# Altium PCB PCB2.PcbDoc
Units mil, origin at the board's own origin, x right, y up, seen from the top; angles counter-clockwise.
Board outline 1690 x 1630 mil, 2 copper layers (Top Layer, Bottom Layer); 10 components, 22 nets, 58 pads, 0 vias.
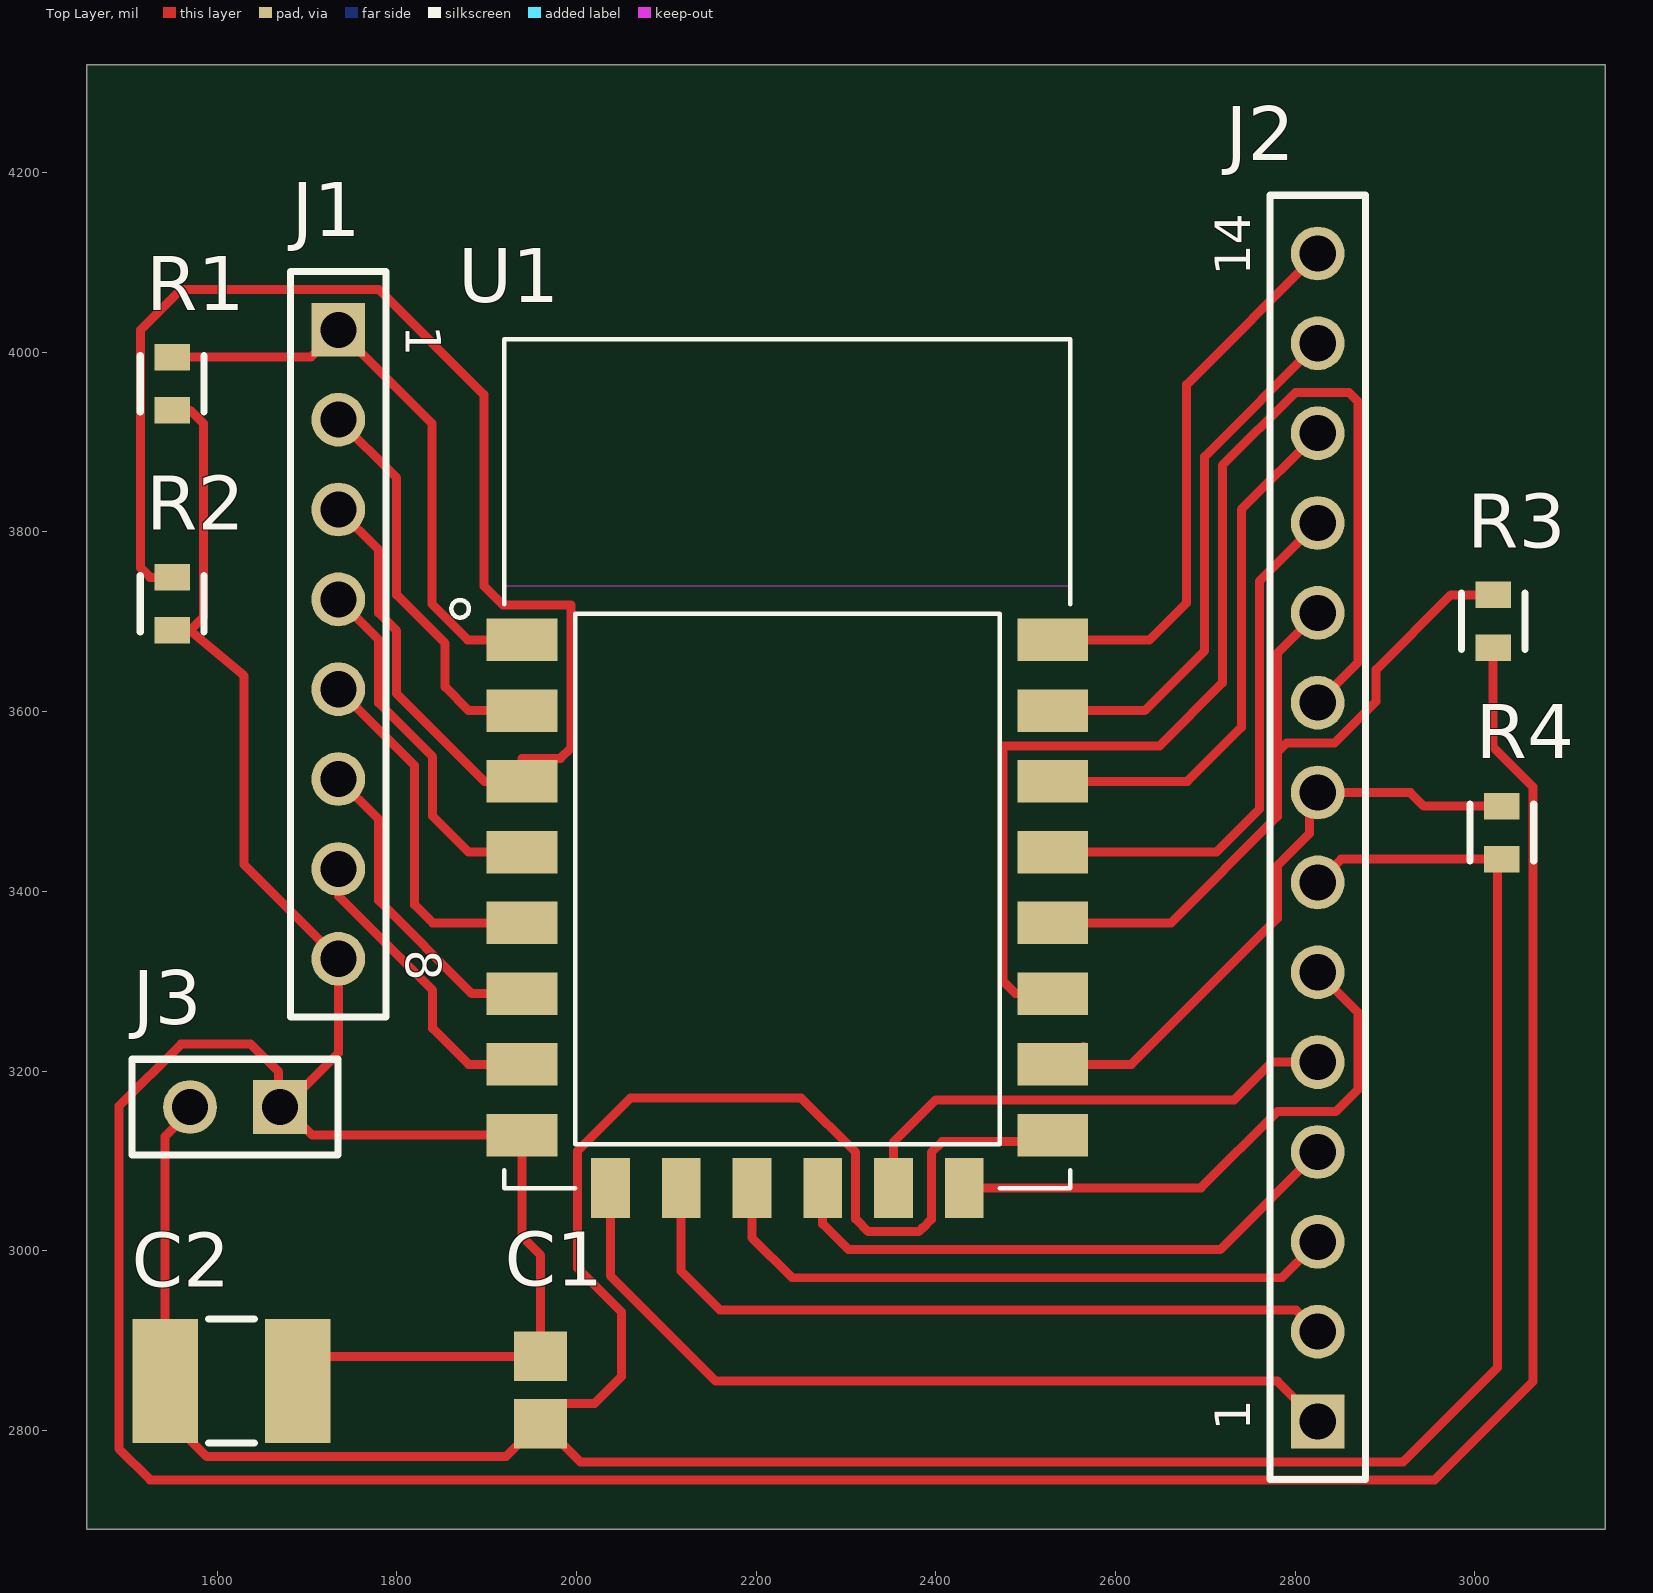
[diagram p0: Top Layer view]
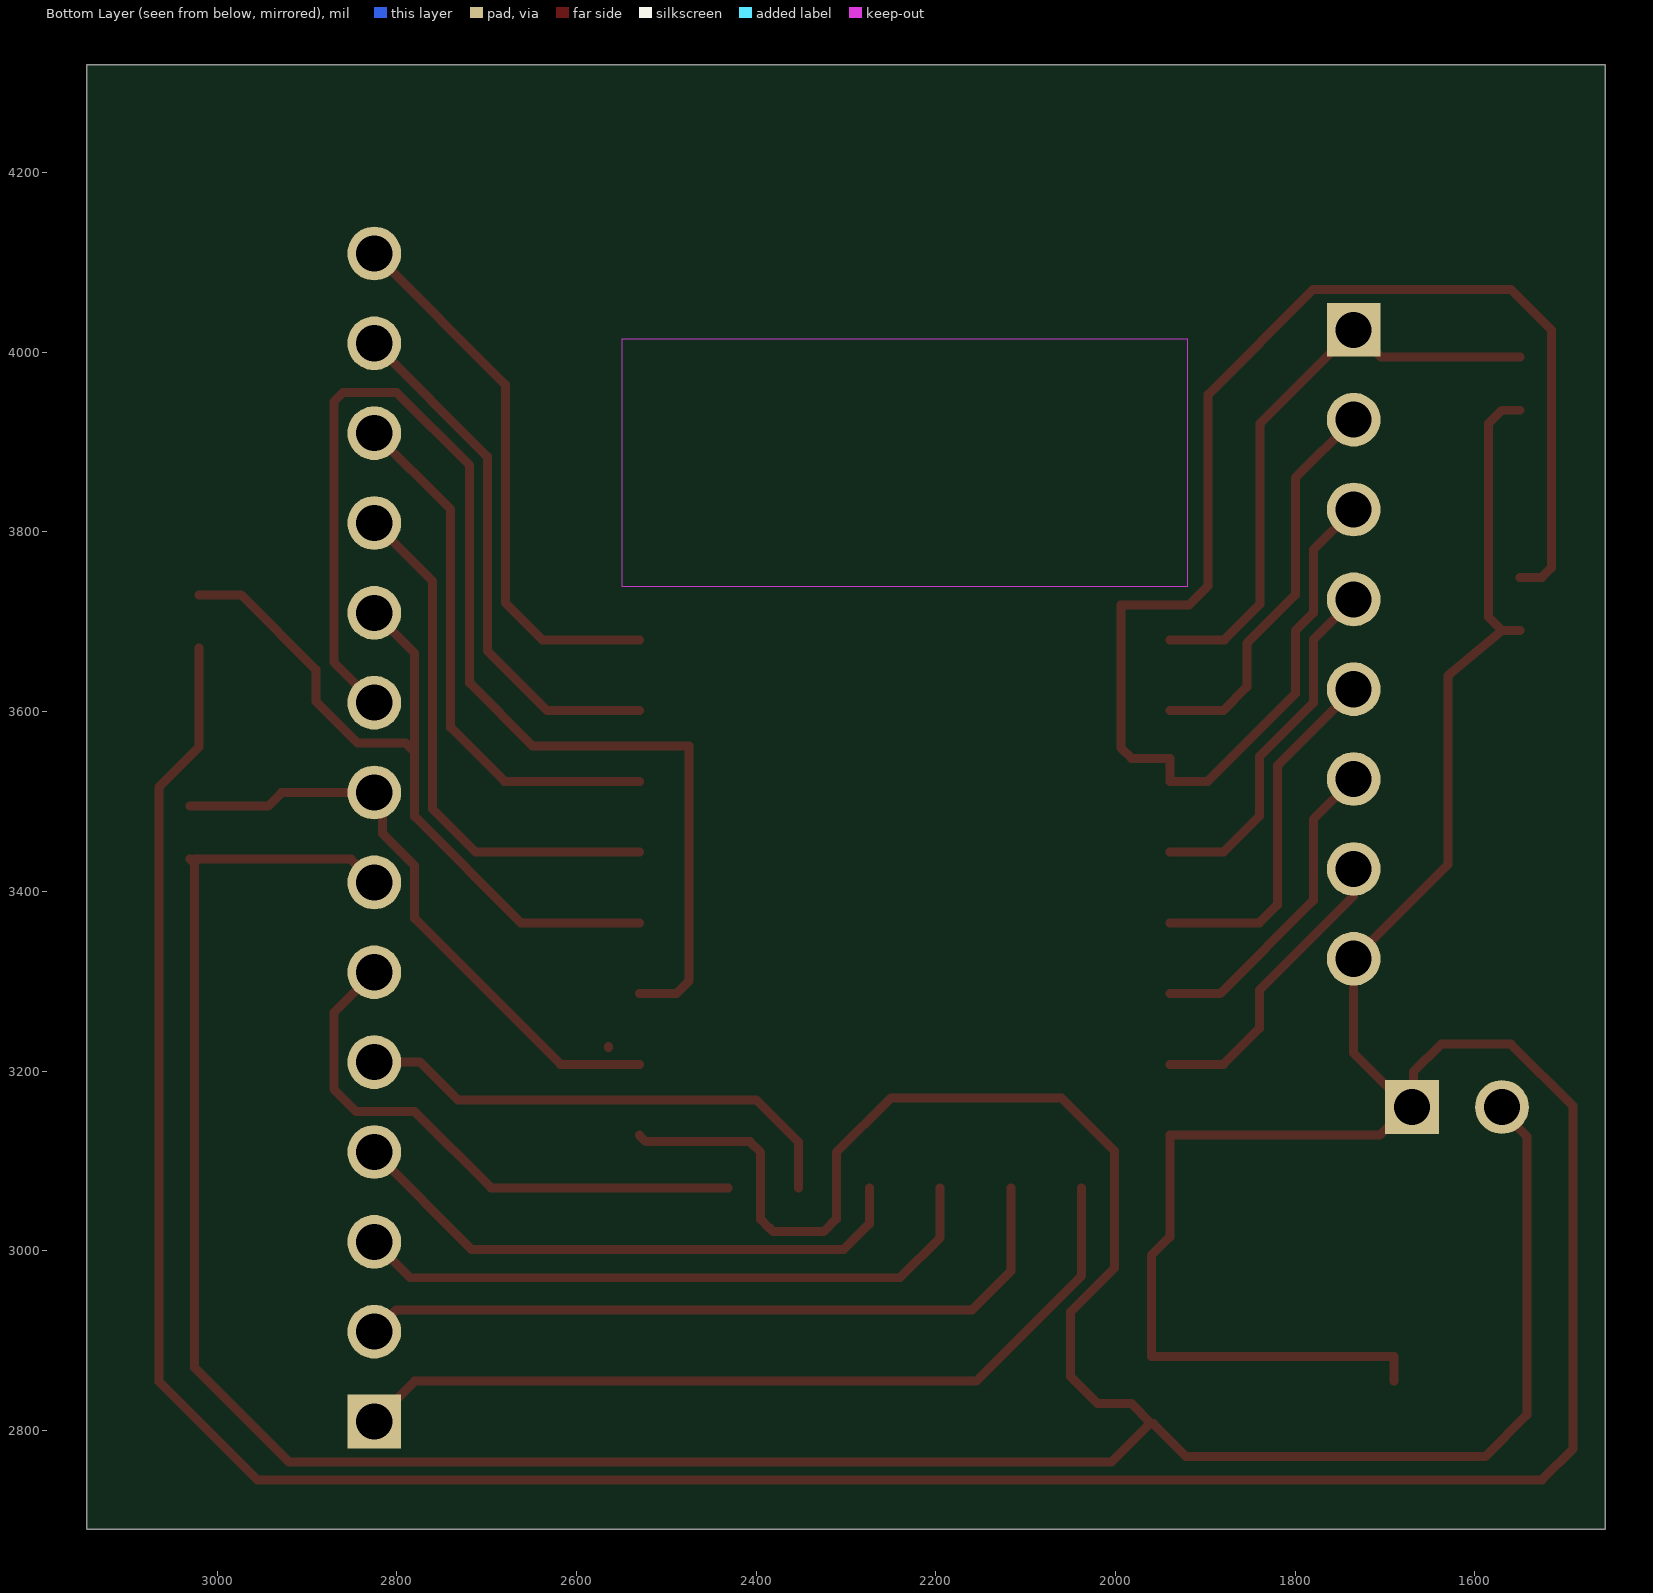
[diagram p1: Bottom Layer view, seen from below]
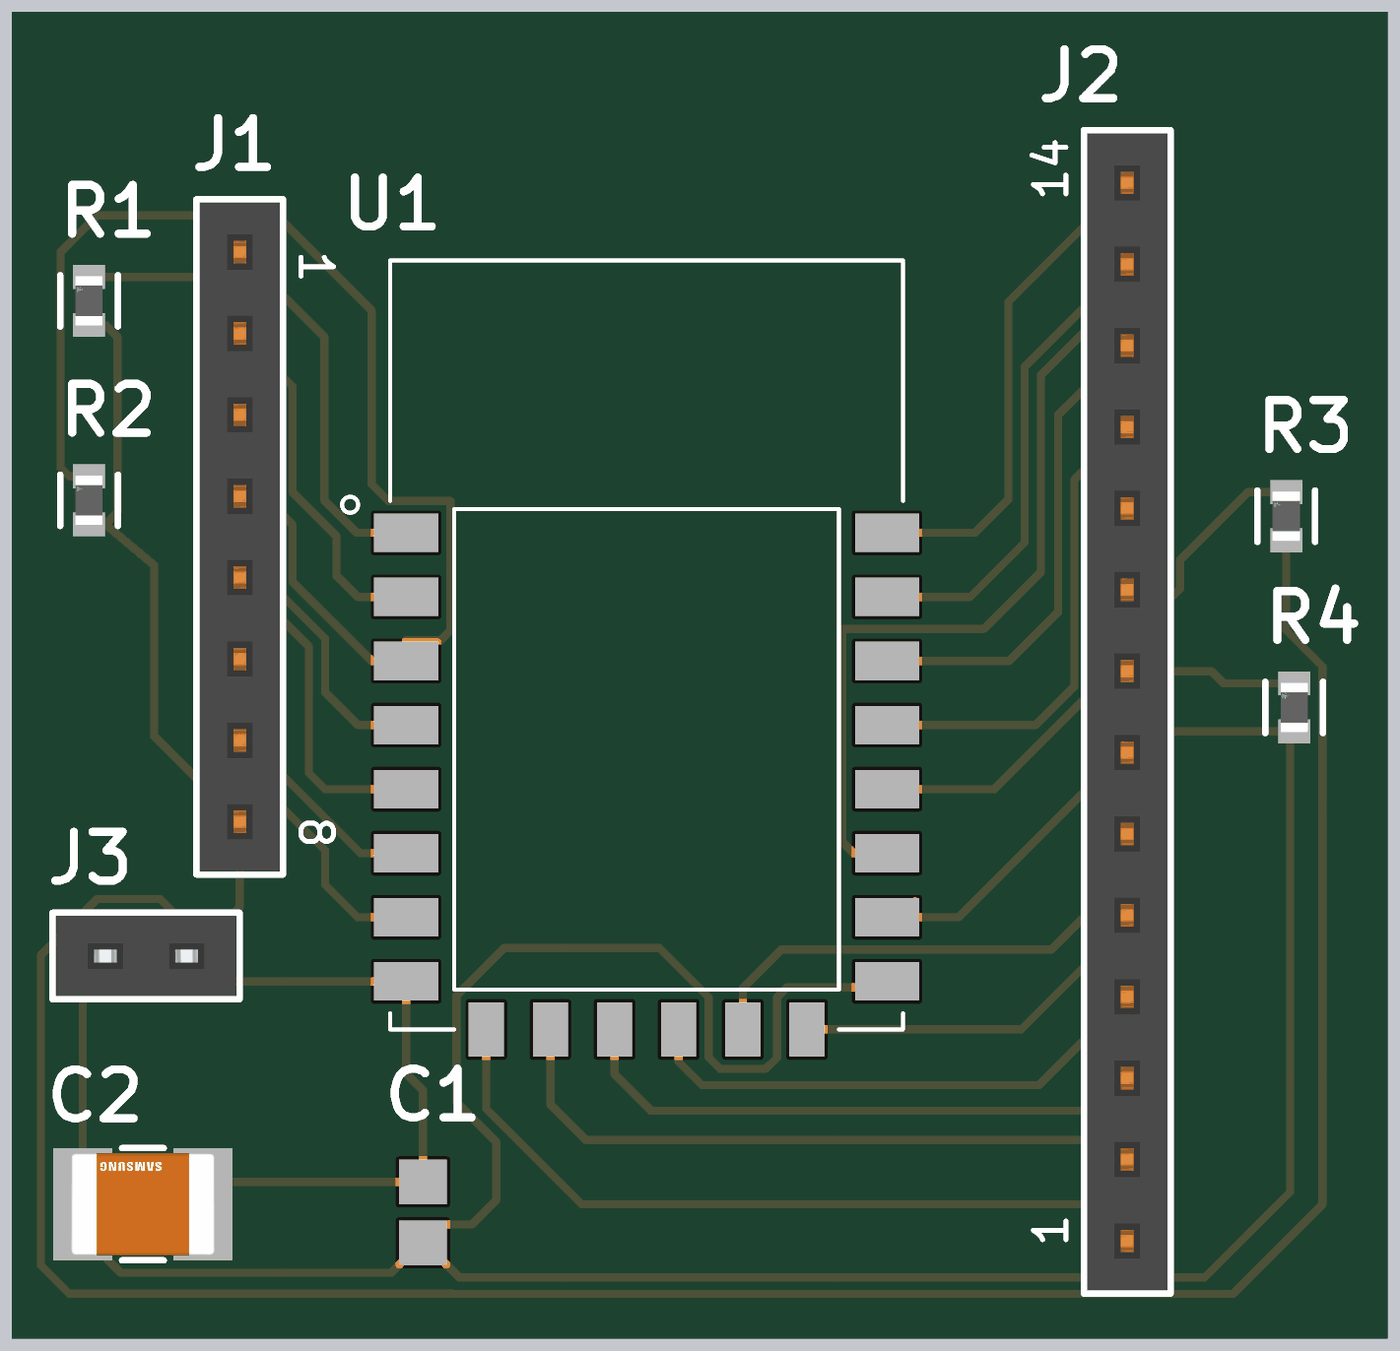
[diagram p2: 3D render of the assembled board from above, using the file's embedded part models]

## Layer stack, top to bottom
Top Solder: solder mask 0.4, Solder Resist, Dk 3.5
Top Layer: signal copper 1.4
Dielectric 1: dielectric 12.6, FR-4, Dk 4.8
Bottom Layer: signal copper 1.4
Bottom Solder: solder mask 0.4, Solder Resist, Dk 3.5

## Board outline
1455,2690 3145,2690 3145,4320 1455,4320

## Design rules (kind name [scope] priority, off if disabled: settings)
Clearance [All] p1: gap=10 ignorepadtopadclearanceinfootprint=FALSE except(0: Arc-Hole Track-Hole SMDPad-Hole THPad-Hole Via-Hole Fill-Hole Poly-Hole Region-Hole Text-Hole)
PolygonConnect [All] p1: connectstyle=Relief reliefconductorwidth=10 reliefentries=4 polygonreliefangle="90 Angle" airgapwidth=10
RoutingVias [All] p1: holewidth=28 width=50 viastyle="Through Hole" minholewidth=28 minwidth=50 maxholewidth=28 maxwidth=50
SilkToSolderMaskClearance [IsPad] p1: minsilkscreentomaskgap=5 clearancetoexposedcopper=TRUE
SolderMaskExpansion [All] p1: expansion=4 istentingtop=FALSE
Width [All] p1: maxlimit=10 minlimit=10 preferedwidth=10
29 further rules are at their usual default settings.

## Components (designator, comment, footprint, x,y, rotation, side; value= is the part's Value field where it differs from the comment)
C1 "10uF" CAPC2013X95X45ML10T25 1960,2845 r90 top
C2 "100nF" FP-CL43-IPC_B 1616.17,2855 r180 top
J1 "61300811821" 61300811821 1735,3675 r270 top
J2 "61301411821" 61301411821 2825,3460 r90 top
J3 "61300211821" 61300211821 1620,3160 r180 top
R1 "CRCW060310K0JNEA" FP-CRCW0603-e3-MFG 1550,3965 r90 top
R2 "CRCW060310K0JNEA" FP-CRCW0603-e3-MFG 1550,3720 r90 top
R3 "CRCW060310K0JNEA" FP-CRCW0603-e3-MFG 3020.24,3700.47 r90 top
R4 "CRCW060310K0JNEA" FP-CRCW0603-e3-MFG 3030,3465.47 r90 top
U1 "ESP8266-12E/ESP-12E" XCVR_ESP8266-12E/ESP-12E 2234.72,3404.41 r0 top

## Footprints (in the part's own frame and the unit in brackets; to place one, negate y for a bottom-side part, rotate by r counter-clockwise, add the part's x,y. Pads: shape width x height; smd on the part's side, far side on the other; paste and mask are expansions set on the pad)
61300211821 [mm] "Socket Header, Pitch 2.54 mm, THT, Vertical, single row, 2p"
  rect 1.52x1.52 hole 1.02: 1(-1.27,0)
  round 1.52 hole 1.02: 2(1.27,0)
  silkscreen extent -2.92,-1.35 2.92,1.35, body extent -2.79,-1.25 2.79,1.25, height 8.55
61300811821 [mm] "Socket Header, Pitch 2.54 mm, THT, Vertical, single row, 8p"
  rect 1.52x1.52 hole 1.02: 1(-8.89,0)
  round 1.52 hole 1.02: 2(-6.35,0) 3(-3.81,0) 4(-1.27,0) 5(1.27,0) 6(3.81,0) 7(6.35,0) 8(8.89,0)
  silkscreen extent -10.54,-1.35 10.54,1.35, body extent -10.41,-1.25 10.41,1.25, height 8.55
61301411821 [mm] "Socket Header, Pitch 2.54 mm, THT, Vertical, single row, 14p"
  rect 1.52x1.52 hole 1.02: 1(-16.51,0)
  round 1.52 hole 1.02: 2(-13.97,0) 3(-11.43,0) 4(-8.89,0) 5(-6.35,0) 6(-3.81,0) 7(-1.27,0) 8(1.27,0) 9(3.81,0) 10(6.35,0) 11(8.89,0) 12(11.43,0) 13(13.97,0) 14(16.51,0)
  silkscreen extent -18.16,-1.35 18.16,1.35, body extent -18.03,-1.25 18.03,1.25, height 8.55
CAPC2013X95X45ML10T25 [mm] "Chip Capacitor, 2-Leads, Body 2.00x1.25mm, IPC Low Density"
  rect 1.4x1.5 smd: 1(-0.95,0) 2(0.95,0)
  body extent -1.05,-0.67 1.05,0.67, height 0.95
FP-CL43-IPC_B [mil]
  rect 72.94x137.96 smd paste+0 mask+0: 1(-73.83,0) 2(73.83,0)
  silkscreen extent -26,-69 26,69, body extent -120,-79 120,79, height 10
FP-CRCW0603-e3-MFG [mm]
  rect 0.75x1 smd paste+0 mask+0: 1(-0.75,0) 2(0.75,0)
  silkscreen extent -0.8,-0.9 0.8,0.9, body extent -1.22,-0.6 1.22,0.6, height 0.25
XCVR_ESP8266-12E/ESP-12E [mm]
  rect 2x1.2 smd: 1(-7.5,7) 2(-7.5,5) 3(-7.5,3) 4(-7.5,1) 5(-7.5,-1) 6(-7.5,-3) 7(-7.5,-5) 8(-7.5,-7) 15(7.5,-7) 16(7.5,-5) 17(7.5,-3) 18(7.5,-1) 19(7.5,1) 20(7.5,3) 21(7.5,5) 22(7.5,7)
  rect 1.1x1.7 smd: 9(-5,-8.5) 10(-3,-8.5) 11(-1,-8.5) 12(1,-8.5) 13(3,-8.5) 14(5,-8.5)
  Keep-Out Layer region: 8,8.51 -8.009,8.51 -8.009,15.5 8,15.5
  Keep-Out Layer region: 8,8.51 -8.009,8.51 -8.009,15.5 8,15.5
  silkscreen extent -9.5,-8.5 8,15.5

## Part data
C1: library part CMP-2007-00182-1, Manufacturer=Murata, Part Number=GRM219R61E106KA12D
C2: library part CMP-13271-000927-1, "Cap Ceramic 100nF 500V X7R ±10% SMD 1812 +125°C Embossed T/R", Case/Package=1812, Dielectric=X7R, Max Operating Temperature=125°C, Min Operating Temperature=-55°C, Package Quantity=4000, Tolerance=10%, Voltage=500V, Capacitance=100nF, Depth=3.2mm, Height=2mm, Length=4.5mm, Mount="Surface Mount", Packaging="Tape and Reel", Radiation Hardening=No, Thickness=0.087inch, Voltage Rating=500V, Voltage Rating (DC)=500V, Width=0.126inch
J1: "WR-PHD Socket Header, THT, pitch 2.54mm, Single Row, Vertical, 8p", Contact Resistance=20mOhm, Manufacturer="Wurth Elektronik", Operating Temperature="-40 to +125degC", Rated Current=3A, Withstanding Voltage=500VAC, Working Voltage=250VAC, ComponentLink1Description=Manufacturer, ComponentLink1URL=http://www.we-online.de, ComponentLink2Description=Datasheet, ComponentLink2URL=https://www.we-online.com/catalog/datasheet/61300811821.pdf, Gender="Socket Header", Manufacturer Part Number=61300811821, Mounting Technology=THT, Orientation=Vertical, Packaging=Tray, Pin Number=8, Pitch=2.54mm, Published Date="May 2020", Row Number=Single
J2: "WR-PHD Socket Header, THT, pitch 2.54mm, Single Row, Vertical, 14p", Contact Resistance=20mOhm, Manufacturer="Wurth Elektronik", Operating Temperature="-40 to +125degC", Rated Current=3A, Withstanding Voltage=500VAC, Working Voltage=250VAC, ComponentLink1Description=Manufacturer, ComponentLink1URL=http://www.we-online.de, ComponentLink2Description=Datasheet, ComponentLink2URL=https://www.we-online.com/catalog/datasheet/61301411821.pdf, Gender="Socket Header", Manufacturer Part Number=61301411821, Mounting Technology=THT, Orientation=Vertical, Packaging=Tray, Pin Number=14, Pitch=2.54mm, Published Date="May 2020", Row Number=Single
J3: "WR-PHD Socket Header, THT, pitch 2.54mm, Single Row, Vertical, 2p", Contact Resistance=20mOhm, Manufacturer="Wurth Elektronik", Operating Temperature="-40 to +125degC", Rated Current=3A, Withstanding Voltage=500VAC, Working Voltage=250VAC, ComponentLink1Description=Manufacturer, ComponentLink1URL=http://www.we-online.de, ComponentLink2Description=Datasheet, ComponentLink2URL=https://www.we-online.com/catalog/datasheet/61300211821.pdf, Gender="Socket Header", Manufacturer Part Number=61300211821, Mounting Technology=THT, Orientation=Vertical, Packaging=Tray, Pin Number=2, Pitch=2.54mm, Published Date="May 2020", Row Number=Single
R1 R2 R3 R4: library part CMP-2000-03838-2, "RES Thick Film, 10kΩ, 5%, 0.1W, 200ppm/°C, 0603", Case Code (Imperial)=0603, Case Code (Metric)=1608, Max Operating Temperature=155°C, Max Power Dissipation=100mW, Min Operating Temperature=-55°C, Package Quantity=1, Resistance=10kR, Temperature Coefficient=200ppm/°C, Tolerance=5%, Voltage Rating=75V, Case/Package=0603, Composition="Thick Film", Contact Plating=Tin, Depth=0.85mm, Features="Automotive AEC-Q200", Height=0.02inch, Lead Free="Lead Free", Length=1.55mm, Military Standard=Not, Mount="Surface Mount", Number of Pins=2, Number of Terminations=2, Packaging="Tape and Reel", Power Rating=100mW, Radiation Hardening=No, Termination=SMD/SMT, Voltage Rating (DC)=75V, Weight=7.1E-05oz, Width=0.033inch
U1: "This WiFi module has a 32-bit MCU micro and clock speeds supporting 80 MHz or 160 MHz. Supports the RTOS and integrated Wi-Fi MAC/BB/RF/PA/LNA, and has an on-board antenna.", Package=None, Availability=Unavailable, MF=AI-Thinker, MP=ESP8266-12E/ESP-12E, Price=None, SnapEDA_Link=https://www.snapeda.com/parts/ESP8266-12E/ESP-12E/AI-Thinker/view-part/106414/?ref=snap

## Nets (pads, with @x,y where several pads share a name; then routed paths per layer and width w, separated by ;. In a path a pad name is that pad's centre, name@x,y a point inside that pad or via, vN(x,y) a via of type N, cw(c..) or ccw(c..) an arc to the next point about the centre after c; other vN are vias at no path point)
ADC: J1.2 U1.2 | length 443.2
  Top Layer w10: J1.2 1799.92,3860.08 1799.92,3729.92 1853.74,3676.1 1853.74,3627.52 1880,3601.26 U1.2
CS0: J2.1 U1.9 | length 951.8
  Top Layer w10: U1.9 2037.87,2972.32 2155.19,2855 2780,2855 J2.1
EN: J1.3 R2.2 U1.3 | length 1727.9
  Top Layer w10: R2.2 1525.47,3749.53 1515,3760 1515,4025 1560,4070 1780,4070 1897,3953 1897,3740 1918,3719 1994,3719 1994,3560 1982,3548 1939.45,3548 U1.3 1897.4,3522.52 1799.92,3620 1799.92,3689.92 1779.92,3709.92 1779.92,3780.08 J1.3
GND: C1.1 C2.2 J2.7 J3.2 R4.1 U1.15 | length 3842.4
  Top Layer w10: J3.2@1575,3160 1542.34,3127.34 1542.34,2817.33 1588.65,2771.02 1921.45,2771.02 1958.03,2807.6 C1.1 ; U1.15 2522.67,3121.49 2406.97,3121.49 2394.92,3109.44 2394.92,3034.92 2385.3,3025.3 2384.7,3025.3 2380.7,3021.3 2324.97,3021.3 2310.75,3035.52 2310.75,3109.44 2250.19,3170 2060,3170 2001.22,3111.22 2001.22,2980.69 2050,2931.91 2050,2860 2020.16,2830.16 1982.56,2830.16 C1.1 ; J2.7 2850.94,3435.94 R4.1@3025,3435.94 ; R4.1 3025,3430.94 3025,2870 2920.08,2765.08 2004.49,2765.08 1961.97,2807.6 C1.1
IO0: J2.10 R3.2 U1.18 | length 877.6
  Top Layer w10: U1.18 2661.76,3365.04 2780.08,3483.36 2780.08,3555 ; J2.10 2780.08,3665.08 2780.08,3555 ; R3.2 2973.28,3730 2890,3646.72 2890,3611.47 2843.61,3565.08 2790.16,3565.08 2780.08,3555
IO2: J2.9 U1.17 | length 1380
  Top Layer w10: U1.17 2488.7,3286.3 2475,3300 2475,3562 2649,3562 2719,3632 2719,3874 2800,3955 2860,3955 2870,3945 2870,3655 J2.9
IO4: J2.11 U1.19 | length 595.2
  Top Layer w10: U1.19 2712.21,3443.78 2760.08,3491.65 2760.08,3745.08 J2.11
IO5: J2.12 U1.20 | length 597.5
  Top Layer w10: U1.20 2680,3522.52 2740.08,3582.6 2740.08,3825.08 J2.12
IO9: J2.3 U1.11 | length 719.8
  Top Layer w10: U1.11 2195.35,3014.65 2240,2970 2785,2970 J2.3
IO10: J2.4 U1.12 | length 647.6
  Top Layer w10: U1.12 2274.09,3030 2302.79,3001.3 2716.3,3001.3 J2.4
IO12: J1.6 U1.6 | length 356.1
  Top Layer w10: J1.6 1779.92,3480.08 1779.92,3389.92 1883.54,3286.3 U1.6
IO13: J1.7 U1.7 | length 336.9
  Top Layer w10: J1.7 1735,3394.92 1840,3289.92 1840,3247.56 1880,3207.56 U1.7
IO14: J1.5 U1.5 | length 402.9
  Top Layer w10: J1.5 1819.92,3540.08 1819.92,3385.12 1840,3365.04 U1.5
IO15: J2.8 R4.2 U1.16 | length 688.1
  Top Layer w10: U1.16 2617.56,3207.56 2780.08,3370.08 2780.08,3428.61 2815.79,3464.32 2815.79,3500.79 J2.8 2928,3510 2943,3495 R4.2 ; U1.16@2564.37,3226.18 U1.16@2564.37,3227.17
IO16: J1.4 U1.4 | length 400.7
  Top Layer w10: J1.4 1779.92,3680.08 1779.92,3609.92 1840,3549.84 1840,3483.78 1880,3443.78 U1.4
MISO: J2.2 U1.10 | length 828.7
  Top Layer w10: U1.10 2116.61,2977.39 2160,2934 2801,2934 J2.2
MOSI: J2.5 U1.13 | length 560.2
  Top Layer w10: U1.13 2352.83,3120.83 2400,3168 2732.04,3168 2774.04,3210 J2.5
RESET: J1.1 R1.2 U1.1 | length 662.7
  Top Layer w10: R1.2 1704.53,3994.53 J1.1 1839,3921 1839,3720 1879,3680 U1.1
RXD: J2.13 U1.21 | length 590.8
  Top Layer w10: U1.21 2632.26,3601.26 2699,3668 2699,3884 J2.13
SCLK: J2.6 U1.14 | length 632.9
  Top Layer w10: U1.14 2431.57,3070 2695.08,3070 2780,3154.92 2844.92,3154.92 2870,3180 2870,3265 J2.6
TXD: J2.14 U1.22 | length 615.5
  Top Layer w10: U1.22 2638,3680 2679,3721 2679,3964 J2.14
VCC: C1.2 C2.1 J1.8 J3.1 R1.1 R2.1 R3.1 U1.8 | length 4867
  Top Layer w10: R2.1 1570,3690.47 ; R1.1 1570,3935.47 1585,3920.47 1585,3705.47 1570,3690.47 ; C2.1 1690,2882.4 C1.2 1960,2995 1939.45,3015.55 U1.8 1706.18,3128.82 J3.1@1675,3160 ; R3.1 3020.24,3560.43 3064.69,3515.98 3064.69,2854.69 2955,2745 1996.28,2745 1996.2,2745.08 1525.6,2745.08 1490.87,2779.81 1490.87,3160.92 1559.95,3230 1637.49,3230 1668.43,3199.06 1668.43,3161.57 J3.1 J3.1@1675,3160 ; 1570,3690.47 1630,3640 1630,3430 J1.8 1735,3220 J3.1@1675,3160

## Text inside footprints (layer, text, board x,y; h text height)
J1: Top Overlay "8" at 1810,3335 h40 r270; Top Overlay "1" at 1810,4030 h40 r270
J2: Top Overlay "14" at 2750,4085 h40 r90; Top Overlay "1" at 2750,2800 h40 r90